# Altium PCB Current_Source.PcbDoc
Units mil, origin at the board's own origin, x right, y up, seen from the top; angles counter-clockwise.
Board outline 905 x 750 mil, 2 copper layers (Top Layer, Bottom Layer); 6 components, 8 nets, 25 pads, 0 vias.
Unrouted connection lines stored in the file: 7.
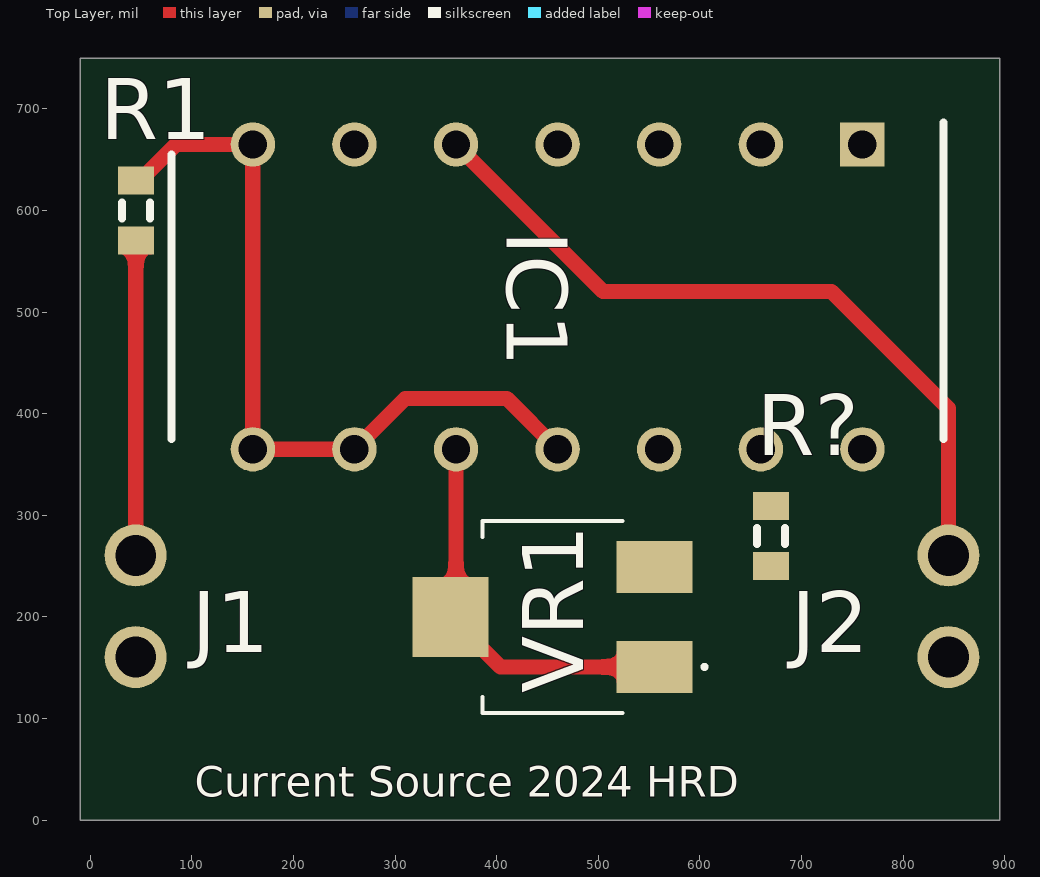
[diagram p0: Top Layer view]
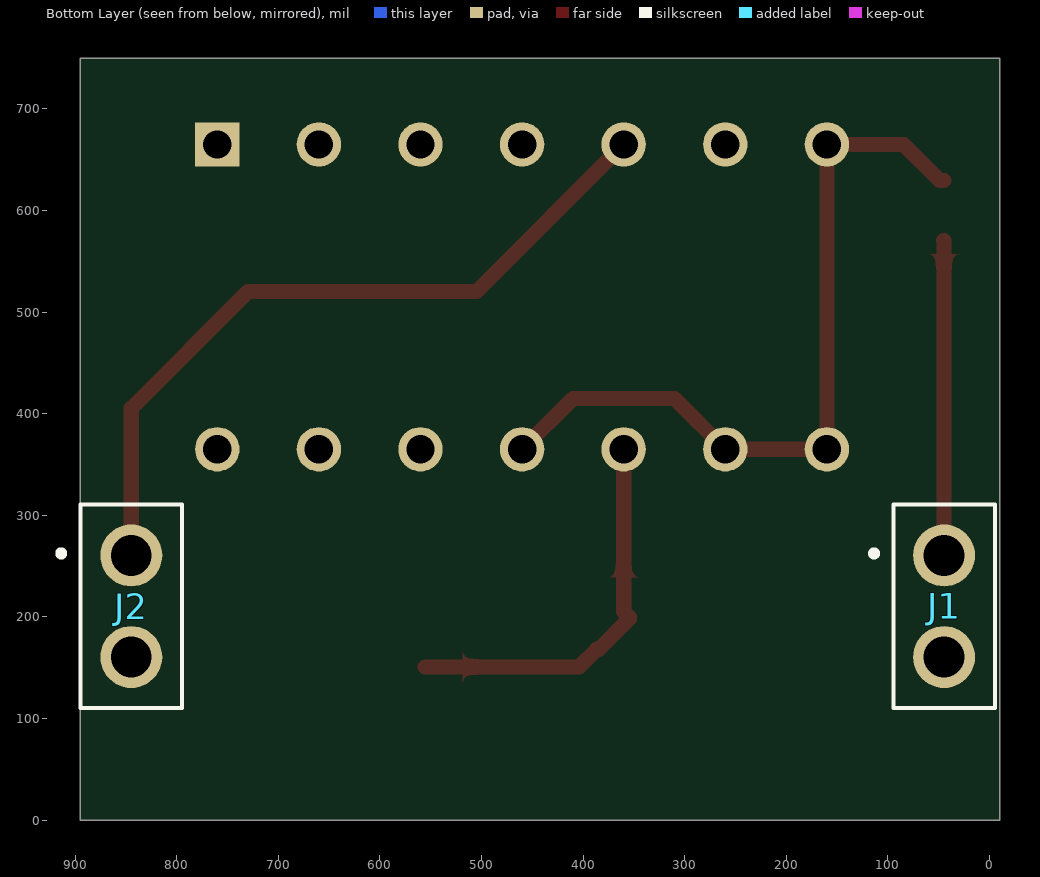
[diagram p1: Bottom Layer view, seen from below]

## Layer stack, top to bottom
Top Solder: solder mask 0.4, Solder Resist, Dk 3.5
Top Layer: signal copper 1.4
Dielectric 1: dielectric 12.6, FR-4, Dk 4.8
Bottom Layer: signal copper 1.4
Bottom Solder: solder mask 0.4, Solder Resist, Dk 3.5

## Board outline
-10,0 -10,750 895,750 895,0

## Design rules (kind name [scope] priority, off if disabled: settings)
Clearance [All] p1: gap=10 ignorepadtopadclearanceinfootprint=FALSE except(0: Arc-Hole Track-Hole SMDPad-Hole THPad-Hole Via-Hole Fill-Hole Poly-Hole Region-Hole Text-Hole)
PolygonConnect [All] p1: connectstyle=Relief reliefconductorwidth=10 reliefentries=4 polygonreliefangle="90 Angle" airgapwidth=10
RoutingVias [All] p1: holewidth=28 width=50 viastyle="Through Hole" minholewidth=28 minwidth=50 maxholewidth=28 maxwidth=50
SilkToSilkClearance [All] p1: silktosilkclearance=0
SilkToSolderMaskClearance [IsPad] p1: minsilkscreentomaskgap=0 clearancetoexposedcopper=TRUE
SolderMaskExpansion [All] p1: expansion=4 istentingtop=FALSE
Width [All] p1: maxlimit=20 minlimit=10 preferedwidth=15
28 further rules are at their usual default settings.

## Components (designator, comment, footprint, x,y, rotation, side; value= is the part's Value field where it differs from the comment)
IC1 "ALD1105PBL" DIP762W51P254L1828H508Q14N 460,515 r270 top
J1 "TSW-102-07-G-S" TSW-102-XX-YY-S 44.67,260.51 r270 bottom
J2 "TSW-102-07-G-S" TSW-102-XX-YY-S 844.67,260.51 r270 bottom
R1 "Res3" J1-0603 45,600 r90 top value=100K
R? "Res3" J1-0603 670,279.53 r270 top value=100K
VR1 "3214X-1-203E" 3214X1203E 455,200 r180 top

## Footprints (in the part's own frame and the unit in brackets; to place one, negate y for a bottom-side part, rotate by r counter-clockwise, add the part's x,y. Pads: shape width x height; smd on the part's side, far side on the other; paste and mask are expansions set on the pad)
3214X1203E [mm]
  rect 1.9x1.3 smd: 1(-2.55,1.25) 3(-2.55,-1.25)
  rect 1.9x2 smd: 2(2.55,0)
  silkscreen extent -3.85,-2.4 1.75,2.4, body extent -3.01,-2.43 2.67,2.4, height 5.32
DIP762W51P254L1828H508Q14N [mm]
  rect 1.11x1.11 hole 0.71: 1(-3.81,7.62)
  round 1.11 hole 0.71: 2(-3.81,5.08) 3(-3.81,2.54) 4(-3.81,0) 5(-3.81,-2.54) 6(-3.81,-5.08) 7(-3.81,-7.62) 8(3.81,-7.62) 9(3.81,-5.08) 10(3.81,-2.54) 11(3.81,0) 12(3.81,2.54) 13(3.81,5.08) 14(3.81,7.62)
  silkscreen extent -4.36,-9.65 3.55,9.65, body extent -3.94,-9.14 3.94,9.14, height 5.08
J1-0603 [mm] "Chip Resistor, Body 1.6x0.8mm, IPC High Density"
  rect 0.7x0.9 smd: 1(-0.75,0) 2(0.75,0)
  silkscreen extent -0.2,-0.35 0.2,0.35, body extent -0.85,-0.48 0.85,0.48, height 0.9
TSW-102-XX-YY-S [mm]
  round 1.55 hole 1.02: 1(0,0) 2(2.54,0)
  silkscreen extent -1.27,-1.8 3.81,1.27, body extent -1.39,-1.28 3.82,1.26, height 9.16

## Part data
IC1: "Integrated Circuit", Manufacturer_Name="Advanced Linear Devices Inc.", Mouser Part Number=585-ALD1105PBL, Datasheet Link=https://www.mouser.es/datasheet/2/8/ALD1105-963896.pdf, Height=5.08mm, Manufacturer_Part_Number=ALD1105PBL, Mouser Price/Stock=https://www.mouser.co.uk/ProductDetail/Advanced-Linear-Devices/ALD1105PBL?qs=Du6x3Vjr3lUq%2FSLBVb98Ng%3D%3D
J1 J2: "Connector", Manufacturer_Name=SAMTEC, Mouser Part Number=200-TSW10207GS, Arrow Part Number=TSW-102-07-G-S, Arrow Price/Stock=https://www.arrow.com/en/products/tsw-102-07-g-s/samtec?region=europe, Datasheet Link=http://suddendocs.samtec.com/prints/tsw-xxx-xx-xxx-x-xx-xxx-mkt.pdf, Manufacturer_Part_Number=TSW-102-07-G-S, Mouser Price/Stock=https://www.mouser.co.uk/ProductDetail/Samtec/TSW-102-07-G-S?qs=iT52DjcXudsNPhlNCDp8vw%3D%3D
R1 R?: "Resistor", LatestRevisionDate=29-May-2009, LatestRevisionNote="IPC-7351 Footprint Added.", PackageDescription="Chip Resistor", PackageReference=J1-0603, Published=8-Jun-2000, Publisher="Altium Limited"
VR1: "Variable Resistor", Manufacturer_Name=Bourns, Mouser Part Number=652-3214X-1-203E, Arrow Part Number=3214X-1-203E, Arrow Price/Stock=https://www.arrow.com/en/products/3214x-1-203e/bourns?region=nac, Datasheet Link=https://www.bourns.com/pdfs/3214.pdf, Height=5.3mm, Manufacturer_Part_Number=3214X-1-203E, Mouser Price/Stock=https://www.mouser.co.uk/ProductDetail/Bourns/3214X-1-203E?qs=GbiU%252BivmtKCiZgVfjOTq7A%3D%3D

## Nets (pads, with @x,y where several pads share a name; then routed paths per layer and width w, separated by ;. In a path a pad name is that pad's centre, name@x,y a point inside that pad or via, vN(x,y) a via of type N, cw(c..) or ccw(c..) an arc to the next point about the centre after c; other vN are vias at no path point)
+5: 
+5V: J1.1 R1.1 | length 310.5
  Top Layer w15: J1.1@44.92,260.26 J1.1 44.83,260.68 44.83,570.31 R1.1
GND: IC1.4 IC1.14 J1.2 J2.2
NetD?_3: IC1.13
NetIC1_5: IC1.5 J2.1 | length 737
  Top Layer w15: IC1.5 504.6,520.4 729.6,520.4 844.67,405.33 J2.1
NetIC1_6: IC1.6 IC1.7 IC1.8 IC1.9 IC1.11 R1.2 | length 771.1
  Top Layer w15: R1.2 48.94,629.53 84.41,665 IC1.7 IC1.8 IC1.9 310,415 410,415 IC1.11
NetIC1_10: IC1.10 IC1.12 R?.2 VR1.1 VR1.2 | length 389.6
  Top Layer w15: IC1.10 360,205.39 VR1.2 354.61,198.03 384.51,168.13 386.48,168.13 403.82,150.79 VR1.1
NetR?_1: R?.1 VR1.3
pads on no net: IC1.1 IC1.2 IC1.3

## Silkscreen, mask and mechanical layers (free items; w line width, h text height)
Top Overlay:
  text "Current Source 2024 HRD" at 103,23 h30
Mechanical 1:
  the board outline again, w10